# Altium PCB PCB1.PcbDoc
Units mil, origin at the board's own origin, x right, y up, seen from the top; angles counter-clockwise.
Board outline 2355 x 1065 mil, 2 copper layers (Top Layer, Bottom Layer); 23 components, 10 nets, 61 pads, 53 vias.
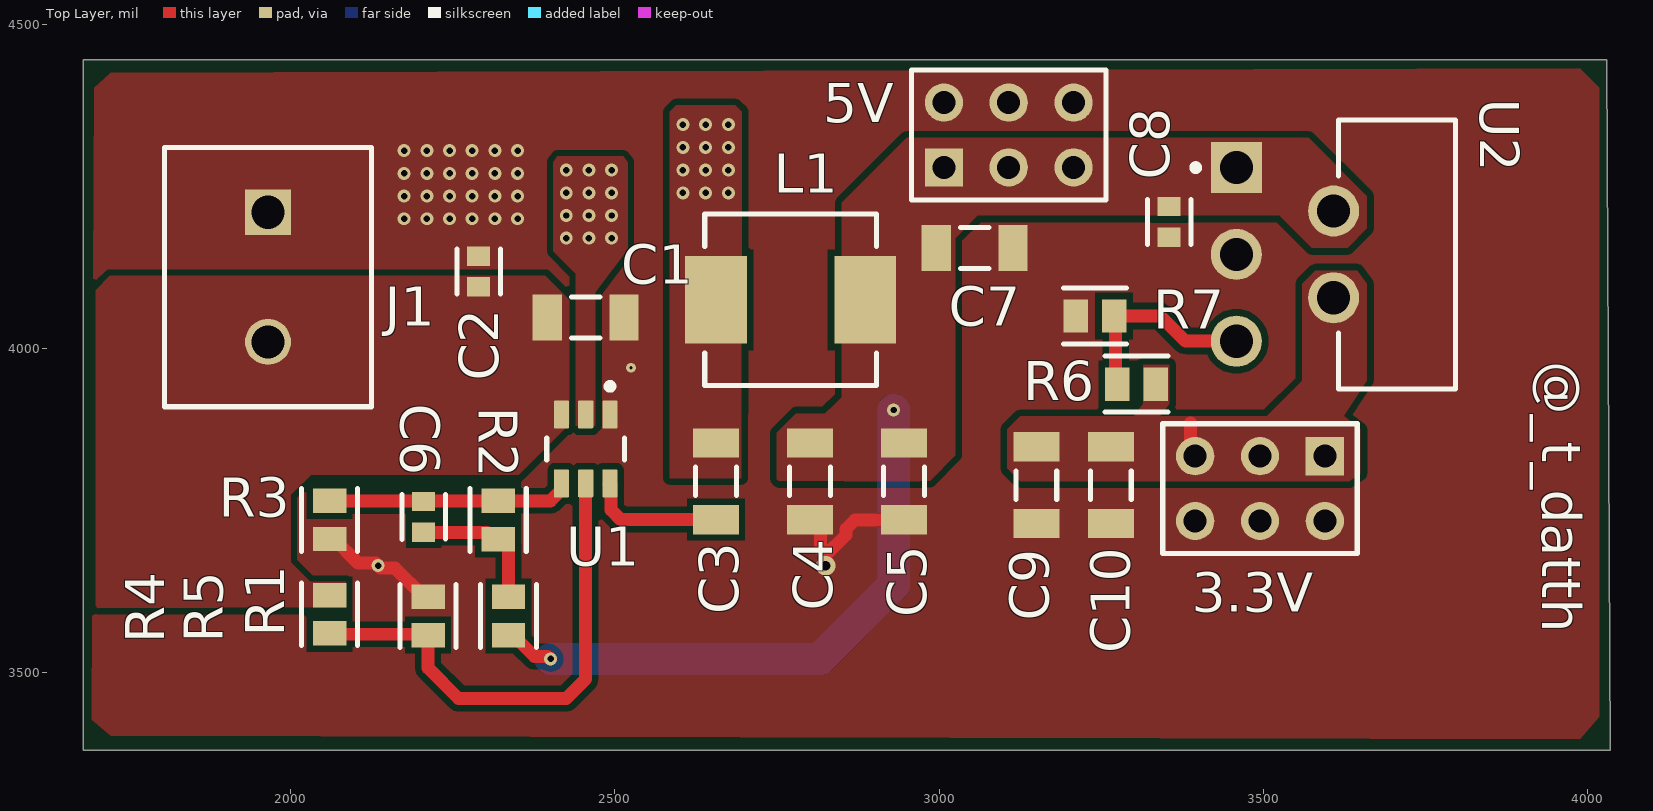
[diagram p0: Top Layer view]
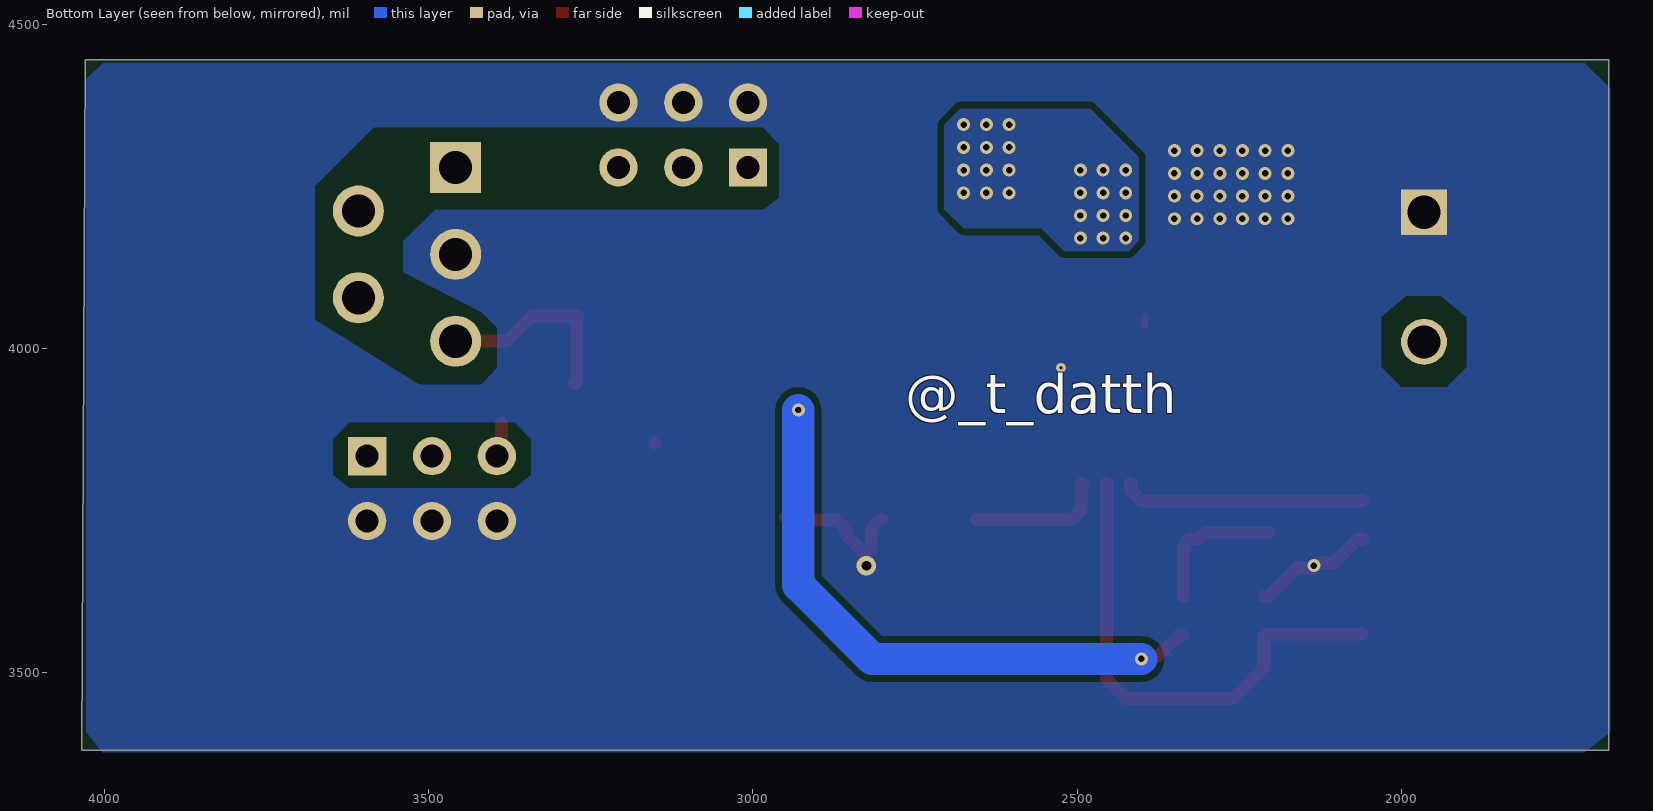
[diagram p1: Bottom Layer view, seen from below]
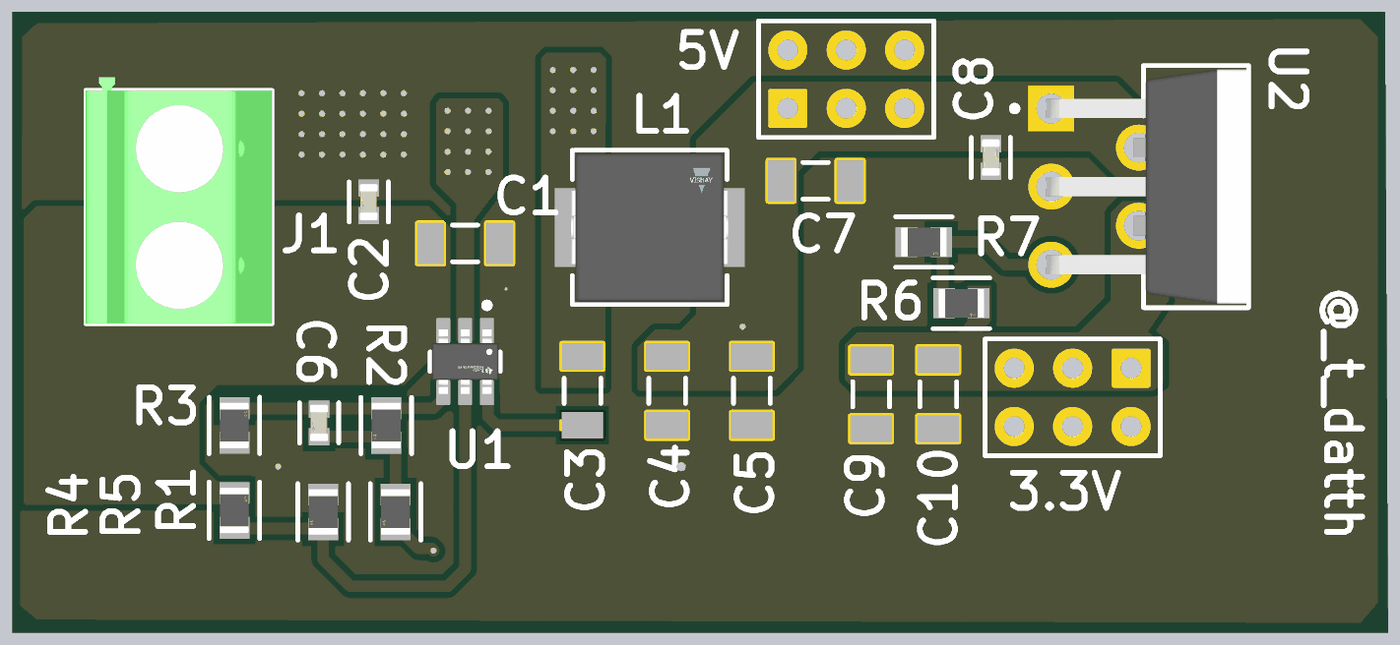
[diagram p2: 3D render of the assembled board from above, using the file's embedded part models]

## Layer stack, top to bottom
Top Solder: solder mask 0.4, Solder Resist, Dk 3.5
Top Layer: signal copper 2.7559
Dielectric 1: dielectric 12.6, FR-4, Dk 4.8
Bottom Layer: signal copper 2.7559
Bottom Solder: solder mask 0.4, Solder Resist, Dk 3.5

## Board outline
4035,3380 1680,3380 1680,4445 4030,4445

## Design rules (kind name [scope] priority, off if disabled: settings)
Clearance [All] p1: gap=10 ignorepadtopadclearanceinfootprint=FALSE except(0: Arc-Hole Track-Hole SMDPad-Hole THPad-Hole Via-Hole Fill-Hole Poly-Hole Region-Hole Text-Hole)
MinimumSolderMaskSliver [All] p1: minsoldermaskwidth=4
PolygonConnect [All] p1: connectstyle=Direct reliefconductorwidth=10 reliefentries=4 polygonreliefangle="90 Angle" airgapwidth=10
RoutingVias [All] p1: holewidth=28 width=50 viastyle="Through Hole" minholewidth=28 minwidth=50 maxholewidth=28 maxwidth=50
SolderMaskExpansion [All] p1: expansion=4 istentingtop=FALSE
Width 4 [All] p1: maxlimit=50 minlimit=10 preferedwidth=20 minimp=50.000000 maximp=50.000000 favimp=50.000000
29 further rules are at their usual default settings.

## Components (designator, comment, footprint, x,y, rotation, side; value= is the part's Value field where it differs from the comment)
3.3V "Header 3X2" HDR2X3 3595,3833.81 r180 top
5V "Header 3X2" HDR2X3 3007.47,4279.18 r0 top
C1 "10u" CAPC1206(3216)170_N 2455,4047.57 r180 top value=560nF
C2 "0.1u" FP-C0603C-CF-MFG 2290,4118.62 r90 top value="300 pF"
C3 "10u" CAPC1206(3216)170_N 2655.94,3795 r270 top value=560nF
C4 "22u" CAPC1206(3216)170_N 2800.94,3795 r270 top value=560nF
C5 "22u" CAPC1206(3216)170_N 2945.94,3795 r270 top value=560nF
C6 "75p" FP-C0603C-CF-MFG 2205,3740 r90 top value="300 pF"
C7 "10u" CAPC1206(3216)170_N 3055,4155 r180 top value=560nF
C8 "0.1u" FP-C0603C-CF-MFG 3355,4195 r270 top value="300 pF"
C9 "10u" CAPC1206(3216)170_N 3150,3789.06 r90 top value=560nF
C10 "0.1u" CAPC1206(3216)170_N 3265,3789.06 r90 top value=560nF
J1 "1729128" PHOE-1729128-2_V 1965,4110 r270 top
L1 "10uH" FP-IHLP-2525CZ-FP_2_413x3-MFG 2770.94,4075 r0 top
R1 "49.9" FP-TFCR0805-IPC_C 2335.94,3587.42 r90 top
R2 "100k" FP-TFCR0805-IPC_C 2320,3735.42 r90 top
R3 "13.3k" FP-TFCR0805-IPC_C 2060,3735.58 r270 top
R4 "105k" FP-TFCR0805-IPC_C 2060,3590 r270 top
R5 "105k" FP-TFCR0805-IPC_C 2211.94,3587.42 r90 top
R6 "3.48k" FP-TFCR0805-IPC_C 3304.58,3945 r180 top
R7 "2k" FP-TFCR0805-IPC_C 3240.42,4050 r180 top
U1 "TPS54302DDCR" FP-DDC0006A-MFG 2455,3845 r270 top
U2 "LT1963ET#06PBF" FP-T-5-05-08-1421-MFG 3706.27,4145 r0 top

## Footprints (in the part's own frame and the unit in brackets; to place one, negate y for a bottom-side part, rotate by r counter-clockwise, add the part's x,y. Pads: shape width x height; smd on the part's side, far side on the other; paste and mask are expansions set on the pad)
CAPC1206(3216)170_N [mm] "Chip Capacitor, Body 3.2x1.6mm, Height 1.7mm, IPC Medium Density"
  rect 1.15x1.8 smd: 1(-1.5,0) 2(1.5,0)
  silkscreen extent -0.55,-0.8 0.55,0.8, body extent -1.7,-0.9 1.7,0.9, height 1.7
FP-C0603C-CF-MFG [mm]
  rect 0.75x0.9 smd paste+0 mask+0: 1(-0.6,0) 2(0.6,0)
  silkscreen extent -0.87,-0.85 0.88,0.85, body extent -1.2,-0.6 1.2,0.6, height 0.25
FP-DDC0006A-MFG [mm]
  rrect17% 1.1x0.6 smd paste+0 mask+0: 1(-1.35,0.95) 2(-1.35,0) 3(-1.35,-0.95) 4(1.35,-0.95) 5(1.35,0) 6(1.35,0.95)
  silkscreen extent -2.57,-1.53 0.43,1.53, body extent -2,-1.63 2,1.63, height 0.25
FP-IHLP-2525CZ-FP_2_413x3-MFG [mil]
  rect 95x135 smd paste+0 mask+0: 1(-115,0) 2(115,0)
  silkscreen extent -132,-132 132,132, body extent -166,-136 166,136, height 10
FP-T-5-05-08-1421-MFG [mm]
  rect 2x2 hole 1.3 paste-1000 mask+0: 1(-6.293,3.4)
  round 2 hole 1.3 paste-1000 mask+0: 2(-2.483,1.7) 3(-6.293,0) 4(-2.483,-1.7) 5(-6.293,-3.4)
  silkscreen extent -8.01,-5.27 2.29,5.27, body extent -7.39,-5.37 2.39,5.37, height 0.25
FP-TFCR0805-IPC_C [mil]
  rect 37.63x51.5 smd paste+0 mask+0: 1(-29.58,0) 2(29.58,0)
  silkscreen extent -48,-43 48,43, body extent -52,-31 52,31, height 10
HDR2X3 [mm] "Connector; Header; 3x2 Position"
  rect 1.5x1.5 hole 0.9: 1(0,0)
  round 1.5 hole 0.9: 2(0,2.54) 3(2.54,0) 4(2.54,2.54) 5(5.08,0) 6(5.08,2.54)
  silkscreen extent -1.27,-1.27 6.35,3.81
PHOE-1729128-2_V [mm] "Receptacle, 2-Leads, Body 8.1x10.16mm, Pitch 5.08mm"
  rect 1.8x1.8 hole 1.3: 1(-2.54,0)
  round 1.8 hole 1.3: 2(2.54,0)
  silkscreen extent -5.08,-4.05 5.08,4.05, body extent -5.65,-4.05 5.08,4.05, height 10.01

## Part data
3.3V 5V: "Header, 3-Pin, Dual row", LatestRevisionDate=17-Jul-2002, LatestRevisionNote="Re-released for DXP Platform.", Publisher="Altium Limited"
C1 C3 C4 C5 C7 C9 C10: library part CMP-1037-04598-2, "CAP 560nF 25V ±5% 1206 (3216 Metric) Thickness 1.7mm SMD", Case-EIA=1206, Case-Metric=3216, Rated Voltage="25 V", Tolerance=Â±5%, Max Thickness="1.7 mm", Technology=SMT
C2 C6 C8: library part CMP-03020-005974-1, "C0603 300 pF X8R 30ppm/°C 1.00% 10 V", Capacitance="300 pF", Manufacturer=KEMET, Manufacturer Part Number=C0603C301F8HACTU, Package=C0603C-CF, Temperature="-55°C to +125°C", Temperature Characteristic=X8R, Temperature Coefficient=30ppm/°C, Temperature Range High=+125°C, Temperature Range Low=-55°C, Tolerance=0.01, Voltage Rating="10 V", Automotive=Yes, Automotive Grade="Grade 1", Category=Cap, ComponentLink2Description=Datasheet, ComponentLink2URL=https://api.kemet.com/component-edge/download/datasheet/C0603C100J5GACAUTO.pdf, Device Class L1="Passive Components", Device Class L2=Capacitors, Device Class L3="Ceramic Capacitors", Height=0.87mm, Lead Free=Yes, Material=Ceramic, Octopart=https://octopart.com/c0603c301f8hactu-kemet-88725572, RoHS=TRUE
J1: library part CMP-2000-05815-1, "PCB Terminal Block, 13.5 A, 400 V, 2-Pin THD, RoHS, Bulk", Current Rating=13500mA, Manufacturer="Phoenix Contact", Package Description="2-Pin Through Hole Device, Body 8.1 x 10.16 mm, Pitch 5.08 mm", Package Reference=1729128-2, Package Version=03/2015, Voltage Rating=400V, Datasheet URL=https://datasheet.ciiva.com/16046/1729128-16046181.pdf, Datasheet Version=12/2013, Manufacturer URL=http://www.phoenixcontact.com/, Mounting Technology=ThroughHole, No. of Positions=2, No. of Rows=1, Orientation=Horizontal, Package URL=https://www.phoenixcontact.com/online/portal/pi/pxc/product_detail_page/!ut/p/b1/3VdJjqNKFDxLH8AFycySyWY2ozFsEPOMMQaDOX1XedGL_1Vdm5YXJleknhSKeBkvI6EA8ncAo3AYoDhBQGco6KN7VURTdemj9us_IEKEZo_YHiPAEWEFmDGOHMORkqKYCORBZxgL7ZoaZYcbFFUZ3fqxSY6GOuxydWUuHqz1ynmMFygu583Bob0Ewr6Sd_l-5m-kAueHiB0jpRwZwe58wwtkpxtMYd_LmGcDRU02dRNEyWt6Y2ti5pSyJ_reIkzIulrqApdnbT11V5jnCKbYNCvhEM1MCpPByat_X379-iThf08CI5GfOPqfBeS3BRoBOdD55AKVv0iLwCMq-2BrzXWSGRH7pUGD9uwXQjiph3xL0DKQwdGa0JImiIOmBNOestqgwTHSSs2oOep-78apyXQBvNi8ZLaFjvjWvcaUEBu0MC6Wbe-d6mB0FAebo2lUWinqYaZs5DAYzV0RP9yitUjnGJ0iI9xhZkT42OCQNUJJhkgWINNQLP2JFP6OpMg3JCVg70jqHT0lvKOnhHf0lPuOnnLf0VPuWx6_dxwUIvwk5WMkT0kLL1mh61l2yZVSzG3pYV_bqo-mj6uMKwKwdnnW8Jh5RTOJzMOA5c-eJDaZQw4mTMPH02PvS_ZAqNVjVTo2WyYLkwH_KU1mmmG5kjRhDqPXLwwVHvVOjCM60-fpXvTDfMGW1PVFVS1r4e4yVDk4ZdNbkUHvqPqQSeian4UD39fNKmachqdJ1NJbyk8rXT9mXTvPk3oE5meulKGgiruPJek-4I9hTT6G8ZLOyRSm2RRVbThERQad5OS28hdt4YW4vG0stgYYzsWsK4_7y6DZMjJSCqri1kyiZR5vD7pwIrNR7QwPHTcLTI5qT7eRlpHrdGiupYlqQDJ7zy_CND8fWWBoLRXxk1RVcXiBQwbTD4Xi7KL-FuO94t9xaqweXzH, Packing=Bulk, PartNumber=1729128, Pitch=5.08mm, RoHS=TRUE
L1: library part CMP-02424-000382-1, "Commercial Inductors, High Saturation Series, 5 % DCR Tolerance 10uH 3A 97.71mΩ 20%", Case/Package=2525, Current Rating=3A, DC Resistance (DCR)=97.71mR, Max Operating Temperature=125°C, Min Operating Temperature=-55°C, Package Quantity=2000, Saturation Current=7A, Test Frequency=100kHz, Tolerance=20%, Depth=6.72mm, Height=3mm, Height - Seated (Max)=0.118inch, Inductance=10uH, Lead Free="Lead Free", Length=0.27inch, Military Standard=Not, Mount="Surface Mount", Packaging="Tape and Reel", Radiation Hardening=No, Shielding=Shielded, Width=0.255inch
R1 R2 R3 R4 R5 R6 R7: library part CMP-250906-233618-1, "RES Thin Film,  2kΩ, 0.1%, 0.1W, 25ppm/°C, 0805"
U1: library part CMP-04918-000032-1, "IC REG BUCK ADJ 3A TSOT23-6", Manufacturer="Texas Instruments", Max Junction Temp=+125°C, Max Supply Voltage=28V, Min Supply Voltage=4.5V, Nominal Supply Current=45uA, Output Current=3A, Output Voltage=0.6-26V, Package=DDC0006A, Switching Frequency=400kHz, Temperature="-40°C to +125°C", Temperature Range Low=-40°C, Automotive=No, Category=IC, ComponentLink2Description=Datasheet, ComponentLink2URL=http://www.ti.com/lit/ds/symlink/tps54302.pdf, Device Class L1="Integrated Circuits (ICs)", Device Class L2="Power Management ICs", Device Class L3="Voltage Regulators - Switching", Digikey Description="IC REG BUCK ADJ 3A TSOT23-6", Height=1.1mm, Ipc Land Pattern Name=SOT95P280X110-6, Lead Free=Yes, Manufacturer Part Number=TPS54302DDCR, Max Duty Cycle=100%, Number Of Outputs=1, Octopart=https://octopart.com/tps54302ddcr-texas+instruments-74209025, Output Type=AdjustableProgrammable, RoHS=TRUE, Standoff Height=0mm, Switching Topology=Buck, Temperature Range High=+125°C
U2: library part CMP-09138-000238-1, "IC REG LIN POS ADJ 1.5A TO220-5", Case/Package=TO-220-5, Dropout Voltage=340mV, Max Operating Temperature=125°C, Min Current Limit=1.6A, Min Operating Temperature=-40°C, Output Current=1.5A, Output Voltage=20V, Package Quantity=50, Mount="Through Hole", Number of Pins=5, Number of Regulators=1, Packaging=Rail/Tube, RoHS Compliant=Yes

## Via types
v1: diameter 20, hole 10, Top Layer to Bottom Layer, tented both sides, 51 vias
v2: diameter 30, hole 15, Top Layer to Bottom Layer, tented both sides, 1 vias
v3: diameter 15, hole 5, Top Layer to Bottom Layer, tented both sides, 1 vias

## Nets (pads, with @x,y where several pads share a name; then routed paths per layer and width w, separated by ;. In a path a pad name is that pad's centre, name@x,y a point inside that pad or via, vN(x,y) a via of type N, cw(c..) or ccw(c..) an arc to the next point about the centre after c; other vN are vias at no path point)
GND: 3.3V.2 3.3V.4 3.3V.6 5V.2 5V.4 5V.6 C1.1 C2.2 C4.2 C5.2 C7.1 C8.2 C9.1 C10.1 J1.1 R3.2 R5.2 R7.2 U1.1 U2.3 | length 426.6
  Top Layer w20: R3.2 2066.94,3706 2104.11,3668.83 2131.17,3668.83 v1(2135,3665) 2138.83,3661.17 2160.83,3661.17 2205.01,3617 R5.2 ; C4.2 2804.49,3735.94 2817.12,3723.31 2817.12,3690.58 2825,3682.71 v2(2825,3665) ; 2825,3680.88 2856.38,3712.26 2856.38,3721.38 2870.47,3735.47 2945.47,3735.47 C5.2@2950,3740
  other v1: 2175,4200 2210,4200 2245,4200 2280,4200 2315,4200 2350,4200 2175,4235 2210,4235 2245,4235 2280,4235 2315,4235 2350,4235 2175,4270 2210,4270 2245,4270 2280,4270 2315,4270 2350,4270 2175,4305 2210,4305 2245,4305 2280,4305 2315,4305 2350,4305
  other v3: 2525,3970
Net3.3V_1: 3.3V.1 3.3V.3 3.3V.5 C9.2 C10.2 R6.1 U2.4 | length 55.9
  Top Layer w20: C9.2@3150,3855.42 C9.2@3151.37,3854.06 ; 3387.53,3884.69 3387.53,3841.28 3.3V.5
Net5V_1: 5V.1 5V.3 5V.5 C4.1 C5.1 C7.2 C8.1 L1.2 R1.1 U2.1 U2.2 | length 926.5
  Top Layer w20: R1.1 2342.88,3557.85 2375.9,3524.83 2397.17,3524.83 v1(2401,3521)
  Bottom Layer w50: v1(2401,3521) 2816,3521 2930,3635 v1(2930,3905)
NetC1_2: C1.2 C2.1 J1.2 R4.1 U1.3 | length 22.6
  Top Layer w10: C1.2@2395.94,4035 C1.2@2395.94,4047.8 ; U1.3@2412.49,3900 U1.3@2412.49,3909.84
NetC3_1: C3.1 L1.1 U1.2
  other v1: 2425,4170 2460,4170 2495,4170 2425,4205 2460,4205 2495,4205 2425,4240 2460,4240 2495,4240 2605,4240 2640,4240 2675,4240 2425,4275 2460,4275 2495,4275 2605,4275 2640,4275 2675,4275 2605,4310 2640,4310 2675,4310 2605,4345 2640,4345 2675,4345
NetC3_2: C3.2 U1.6 | length 212.3
  Top Layer w20: U1.6@2490.59,3790.04 U1.6 2494.21,3790.04 2494.21,3750.79 2509.06,3735.94 C3.2
NetC6_1: C6.1 R1.2 R2.1 | length 218.9
  Top Layer w20: C6.1 2302.53,3716.38 2313.06,3705.85 R2.1 2326.94,3705.85 2335.94,3696.84 R1.2
NetC6_2: C6.2 R2.2 R3.1 U1.4 | length 375.7
  Top Layer w20: R3.1 2060.77,3764.39 2204.23,3764.39 C6.2 2205.69,3764.31 2319.31,3764.31 R2.2 2400.59,3765 2417.6,3782.01 U1.4
NetR4_2: R4.2 R5.1 U1.5 | length 780.7
  Top Layer w20: R4.2 2061.29,3559.14 2210.66,3559.14 R5.1 2211.94,3506.94 2258.89,3460 2425,3460 2455,3490 U1.5
NetR6_2: R6.2 R7.1 U2.5 | length 311.7
  Top Layer w20: R6.2 3272.5,3947.5 3272.5,4047.5 R7.1 3341.29,4050 3380.15,4011.14 U2.5

## Polygon pours and split planes (outlines as drawn)
GND on Top Layer "GND_L01_P032" (solid, pour order 32): 3987.91,4432.09 1722.09,4425.09 1696.91,4402.09 1692.91,3427.09 1722.09,3402.91 3987.91,3397.09 4017.91,3432.09 4017.91,4402.09
Net3.3V_1 on Top Layer "NET3.3V_1_L01_P033" (solid, pour order 33): 3315,3975 3355,3975 3355,3915 3315,3860 3235,3860 3235,3895 3300,3895 3315,3915
Net3.3V_1 on Top Layer "NET3.3V_1_L01_P030" (solid, pour order 30): 3625,3895 3650,3875 3650,3806.67 3632.5,3795 3125,3795 3105,3815 3105,3875 3125,3895
Net5V_1 on Top Layer "NET5V_1_L01_P028" (solid, pour order 28): 2850,3880 2850,4225 2950,4325 3510,4325 3587.57,4247.43 3545.14,4205 3060,4205 3025,4170 3025,3880
Net5V_1 on Top Layer "NET5V_1_L01_P029" (solid, pour order 29): 3470,4325 3570,4325 3660,4235 3660,4185 3630,4155 3575,4155 3445.17,4284.83
Net3.3V_1 on Top Layer "NET3.3V_1_L01_P031" (solid, pour order 31): 3580,4120 3645,4120 3660,4100 3660,3950 3620,3890 3500,3890 3560,3950 3560,4100
Net5V_1 on Top Layer "NET5V_1_L01_P002" (solid, pour order 2): 2853.79,3795 2970,3795 2970,4172.5 2960,4185 2860,4185 2850.14,4168.98
NetC3_1 on Top Layer "NETC3_1_L01_P003" (solid, pour order 3): 2685.64,4375 2595,4375 2585,4365 2585,3800 2695,3800 2695.87,4364.77
NetC3_1 on Top Layer "NETC3_1_L01_P004" (solid, pour order 4): 2440,3881 2470,3881 2470,4086.61 2520,4152.73 2520,4287.42 2512.83,4296 2411.35,4296 2405,4287.42 2405,4150 2440,4115
GND on Top Layer "GND_L01_P010" (solid, pour order 10): 2479.56,4065.08 2481,3881 2545,3881 2550,3888 2550,4085 2565,4100 2565,4377.24 2520,4423 1724.18,4423 1699,4400 1699,4155 1724.18,4130 2367,4130 2394,4157 2394,4287.33 2407.25,4305 2515.42,4305 2530,4287.08 2530,4125 2495,4083
Net5V_1 on Top Layer "NET5V_1_L01_P013" (solid, pour order 13): 2750,3870 2780,3900 3025,3898.78 3025,3835.09 2986.3,3795.71 2750,3795
NetC1_2 on Top Layer "NETC1_2_L01_P020" (solid, pour order 20): 2430,4075 2393,4112 1721,4112 1699,4090 1699,3827 1721,3805 2352,3805 2430,3883
NetC1_2 on Top Layer "NETC1_2_L01_P023" (solid, pour order 23): 2085,3600.54 1699,3599.47 1699,3855 1720,3876 2033,3876 2033,3807 2000,3774 2000,3670 2030,3640 2085,3640
Net5V_1 on Top Layer "NET5V_1_L01_P025" (solid, pour order 25): 2945,3945 3020,3870 2945,3870
Net5V_1 on Top Layer "NET5V_1_L01_P026" (solid, pour order 26): 2793.9,3869.3 2868.9,3944.3 2868.9,3869.3
GND on Bottom Layer "GND_L02_P024" (solid, pour order 24): 1677.96,3408.59 1717.04,3376.79 4002.96,3376.44 4027.96,3408.59 4027.96,4415 4002.96,4440 1717.04,4440 1677.96,4400.92
NetC3_1 on Bottom Layer "NETC3_1_L02_P007" (solid, pour order 7): 2420,4150 2520,4150 2555,4185 2675,4185 2705,4215 2705,4345 2680,4370 2480,4370 2405,4295 2404.82,4166.04

## Other copper
Bottom Layer:
  pour cut-out: 3367.5,3885 3342.5,3860 3342.5,3805 3367.5,3785 3622.5,3785 3647.5,3805 3647.5,3860 3622.5,3885
  pour cut-out: 2985,4340 2960,4315 2960,4232.5 2983.33,4215 3490,4215 3540,4165 3540,4117.18 3419.06,4055.94 3395,4031.87 3395,3970 3419.06,3945 3515,3945 3675,4044.03 3675,4250 3585,4340
  pour cut-out: 1992,4080.83 2030,4049.17 2030,3970.83 2000,3940.83 1930,3940.83 1900,3970.83 1900,4048.33 1939,4080.83

## Silkscreen, mask and mechanical layers (free items; w line width, h text height)
Top Overlay:
  text "@_t_datth" at 3930,3980 h60 r270
Bottom Overlay:
  text "@_t_datth" at 2765,3900 h60
Mechanical 1:
  the board outline again, w47.24